# EAGLE board EEG (EAGLE 9.6.2)
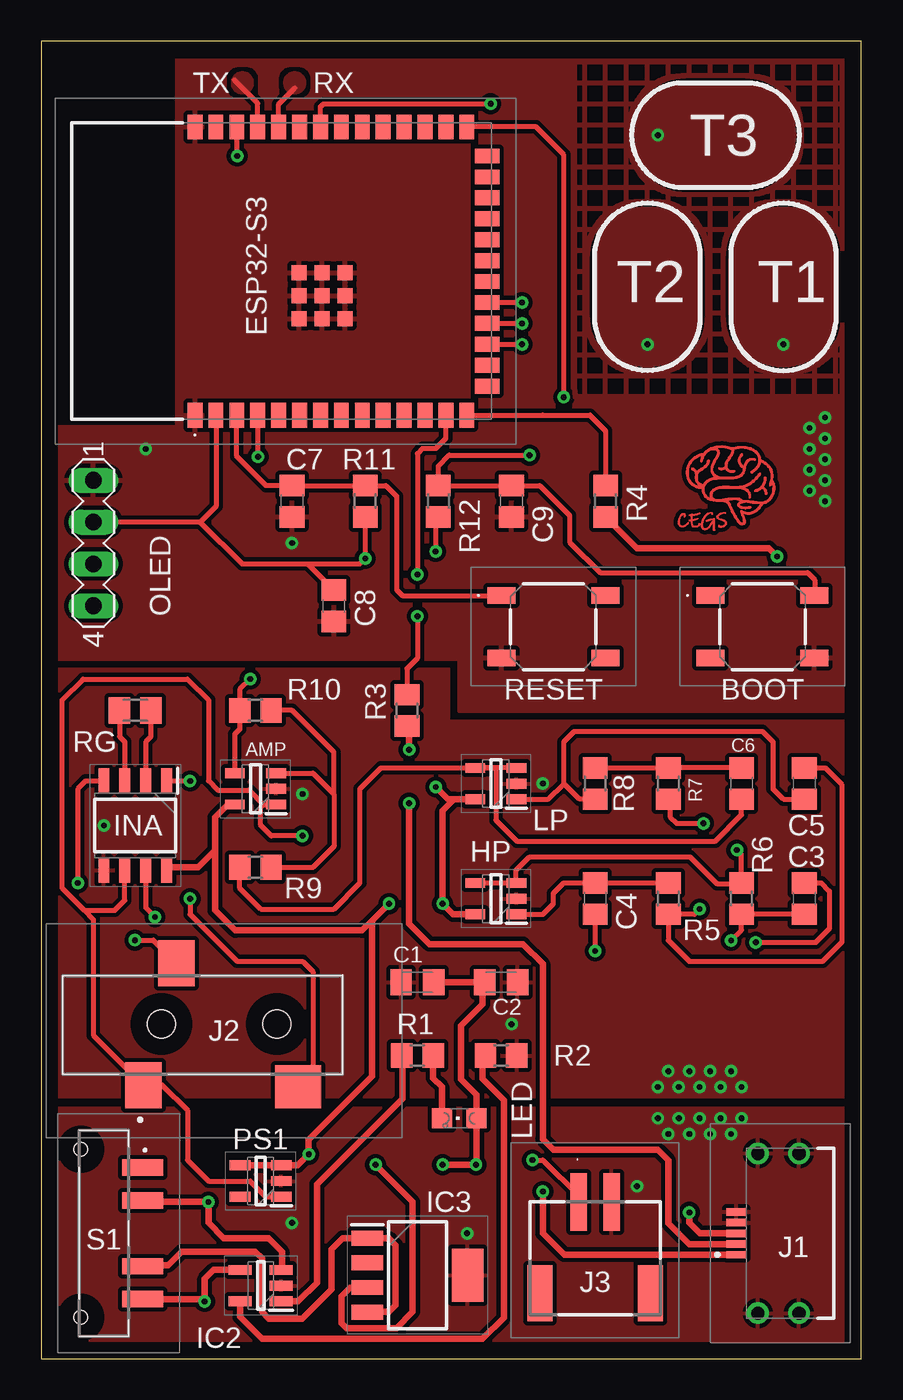
[diagram p0: board, top side]
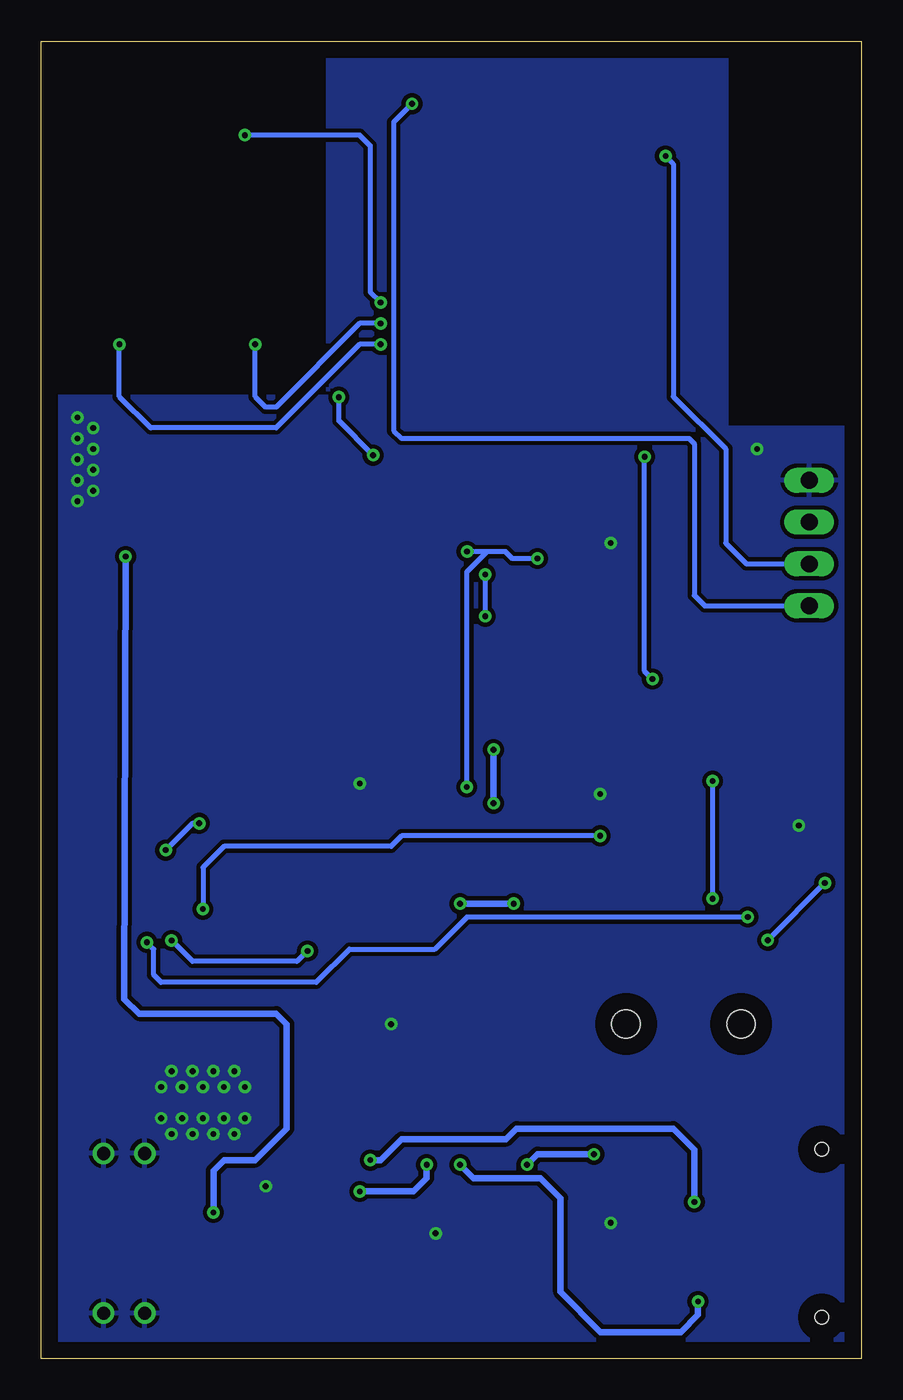
[diagram p1: board, bottom side, seen from below]

Size 49.84 x 80 mm. Coordinates in mm from the lower left corner, seen from the top.
Outline: 0,0 49.84,0 49.84,80 0,80 0,0
Copper layers (1*16): Top 0.035mm / dielectric 1.5mm / Bottom 0.035mm
Design rules "default": minimum track width 6mil, minimum drill 0.35mm, track to track 6mil, track to pad 6mil, pad to pad 6mil, via to via 6mil, smd to smd 6mil, copper to edge 40mil, drill to drill 6mil, minimum pad ring 10mil, minimum via ring 8mil, stop-mask expansion 4mil, vias tented up to drill 0mil, thermal gap 10mil

## Footprints (pad centres in the part's own frame; a part is rotated, then mirrored left to right if it is on the bottom)
SOT95P280X145-5N = smd 1.2 x 0.6: 1 -1.25,0.95; 2 -1.25,0; 3 -1.25,-0.95; 4 1.25,-0.95; 5 1.25,0.95
TS18517SL160SMTTR = smd 1.7 x 1: 1 -3.15,1.9; 2 3.15,1.9; 3 -3.15,-1.9; 4 3.15,-1.9
C0805K = smd 1.3 x 1.6: 1 -1,0; 2 1,0
C0805 = smd 1.3 x 1.5: 1 -0.95,0; 2 0.95,0
ESP32S3WROOM1N16R8 = smd 1.5 x 0.9: 1 -8.75,5.26; 2 -8.75,3.99; 3 -8.75,2.72; 4 -8.75,1.45; 5 -8.75,0.18; 6 -8.75,-1.09; 7 -8.75,-2.36; 8 -8.75,-3.63; 9 -8.75,-4.9; 10 -8.75,-6.17; 11 -8.75,-7.44; 12 -8.75,-8.71; 13 -8.75,-9.98; 14 -8.75,-11.25; 27 8.75,-11.25; 28 8.75,-9.98; 29 8.75,-8.71; 30 8.75,-7.44; 31 8.75,-6.17; 32 8.75,-4.9; 33 8.75,-3.63; 34 8.75,-2.36; 35 8.75,-1.09; 36 8.75,0.18; 37 8.75,1.45; 38 8.75,2.72; 39 8.75,3.99; 40 8.75,5.26 | smd 0.9 x 1.5: 15 -6.985,-12.5; 16 -5.715,-12.5; 17 -4.445,-12.5; 18 -3.175,-12.5; 19 -1.905,-12.5; 20 -0.635,-12.5; 21 0.635,-12.5; 22 1.905,-12.5; 23 3.175,-12.5; 24 4.445,-12.5; 25 5.715,-12.5; 26 6.985,-12.5 | smd 0.9 x 0.9: 41 -1.5,-2.46; 42 -2.9,-1.06; 43 -2.9,-2.46; 44 -2.9,-3.86; 45 -1.5,-3.86; 46 -0.1,-3.86; 47 -0.1,-2.46; 48 -0.1,-1.06; 49 -1.5,-1.06
SOT95P270X145-5N = smd 1.4 x 0.6: 1 -1.25,0.95; 2 -1.25,0; 3 -1.25,-0.95; 4 1.25,-0.95; 5 1.25,0.95
SOT150P700X180-5N = smd 1.9 x 0.9: 1 -3.05,2.25; 2 -3.05,0.75; 3 -3.05,-0.75; 4 -3.05,-2.25 | smd 1.9 x 3.2: 5 3.05,0
SOIC127P600X175-8N = smd 1.525 x 0.65: 1 -2.712,1.905; 2 -2.712,0.635; 3 -2.712,-0.635; 4 -2.712,-1.905; 5 2.712,-1.905; 6 2.712,-0.635; 7 2.712,0.635; 8 2.712,1.905
USB350030AKIT = smd 0.45 x 1.2: 1 -1.3,3.8; 2 -0.65,3.8; 3 0,3.8; 4 0.65,3.8; 5 1.3,3.8 | drill 0.8 pad 1.2: MH1 -4.85,2.5; MH2 4.85,2.5; MH3 -4.85,0; MH4 4.85,0
SJ3523SMTTR = smd 2.2 x 2.8: 1 2.4,-3.7; 3 4.4,3.7 | smd 2.8 x 2.6: 2 11.8,-3.8 | hole 1.7: 3.5,0; 10.5,0
1769 = smd 1 x 3.5: 1 -1,0; 2 1,0 | smd 1.5 x 3.4: 3 -3.35,-5.55; 4 3.35,-5.55
CHIPLED_0805 = smd 1.2 x 1.2: A 0,-1.05; C 0,1.05
MA04-1 = drill 1.016 long: 1 -3.81,0; 2 -1.27,0; 3 1.27,0; 4 3.81,0
SOT95P280X110-5N = smd 1.25 x 0.6: 1 -1.25,0.95; 2 -1.25,0; 3 -1.25,-0.95; 4 1.25,-0.95; 5 1.25,0.95
R0805 = smd 1.3 x 1.5: 1 -0.95,0; 2 0.95,0
M0805 = smd 1.3 x 1.6: 1 -0.95,0; 2 0.95,0
SS4CMVTR = smd 1 x 2.5: A1 -4,2.35; B1 -2,2.35; C1 2,2.35; D1 4,2.35 | hole 0.8: -5.1,-1.4; 5.1,-1.4

## Placement (x,y rotation side)
AMP  LMV321AUIDBVR  [SOT95P280X145-5N]  13.02,34.61 180 top
BOOT  TS18-5-17-SL-160-SMT-TR  [TS18517SL160SMTTR]  43.81,44.45 0 top
C1  10u  [C0805K]  22.86,22.86 180 top
C2  10u  [C0805K]  27.94,22.86 0 top
C3  100nF  [C0805]  46.35,27.94 270 top
C4  100nF  [C0805]  33.66,27.94 90 top
C5  100nF  [C0805]  46.35,34.92 90 top
C6  100nF  [C0805]  42.55,34.92 270 top
C7  0.1uF  [C0805]  15.24,52.07 90 top
C8  0.1uF  [C0805]  17.78,45.72 270 top
C9  0.1 uF  [C0805]  28.57,52.07 90 top
ESP32-S3  ESP32-S3-WROOM-1-N16R8  [ESP32S3WROOM1N16R8]  14.61,66.04 90 top
HP  LMV321AUIDBVR  [SOT95P280X145-5N]  27.62,27.94 180 top
IC2  MCP73831T-2ACI_OT  [SOT95P270X145-5N]  13.34,4.45 180 top
IC3  LP38692MP-3.3_NOPB  [SOT150P700X180-5N]  22.86,5.08 0 top
INA  AD8226ARZ-R7  [SOIC127P600X175-8N]  5.71,32.38 270 top
J1  USB3500-30-A-KIT  [USB350030AKIT]  46.04,7.62 90 top
J2  SJ-3523-SMT-TR  [SJ3523SMTTR]  3.81,20.32 0 top
J3  1769  [1769]  33.66,9.53 0 top
LED  [CHIPLED_0805]  25.4,14.61 90 top
LP  LMV321AUIDBVR  [SOT95P280X145-5N]  27.62,34.92 180 top
OLED  [MA04-1]  3.17,49.53 270 top
PS1  REF2033AIDDCR  [SOT95P280X110-5N]  13.34,10.79 180 top
R1  220  [R0805]  22.86,18.41 0 top
R2  2k  [R0805]  27.94,18.41 180 top
R3  22  [R0805]  22.23,39.37 90 top
R4  22  [R0805]  34.29,52.07 90 top
R5  230k  [R0805]  38.1,27.94 90 top
R6  230k  [R0805]  42.55,27.94 270 top
R7  33k  [R0805]  38.1,34.92 90 top
R8  33k  [R0805]  33.66,34.92 270 top
R9  1k  [R0805]  13.02,29.84 0 top
R10  51k  [R0805]  13.02,39.37 180 top
R11  10k  [R0805]  19.68,52.07 270 top
R12  10k  [R0805]  24.13,52.07 270 top
RESET  TS18-5-17-SL-160-SMT-TR  [TS18517SL160SMTTR]  31.11,44.45 0 top
RG  50  [M0805]  5.71,39.37 0 top
S1  SS4-CM-V-T_R  [SS4CMVTR]  3.81,7.62 270 top

## Library data of the parts
AMP HP LP = LMV321AUIDBVR; DESCRIPTION: Operational Amplifiers - Op Amps Single Low-Voltage, Cost-Optimized Rail-to-Rail Output Operational Amplifier 5-SOT-23 -40 to 125; HEIGHT: 1.45mm; MANUFACTURER_NAME: Texas Instruments; MANUFACTURER_PART_NUMBER: LMV321AUIDBVR; MOUSER_PART_NUMBER: 595-LMV321AUIDBVR; MOUSER_PRICE-STOCK: https://www.mouser.co.uk/ProductDetail/Texas-Instruments/LMV321AUIDBVR?qs=GBLSl2AkirulEcoP6K7rtg%3D%3D
BOOT RESET = TS18-5-17-SL-160-SMT-TR; DESCRIPTION: 5 x 5 mm, 1.7 mm Actuator Height, 160 gf, Silver, Surface Mount, TR, SPST, Tactile Switch; HEIGHT: 1.8mm; MANUFACTURER_NAME: Same Sky; MANUFACTURER_PART_NUMBER: TS18-5-17-SL-160-SMT-TR; MOUSER_PART_NUMBER: 179-TS18517SL160SMTT; MOUSER_PRICE-STOCK: https://www.mouser.co.uk/ProductDetail/CUI-Devices/TS18-5-17-SL-160-SMT-TR?qs=tlsG%2FOw5FFhWy38y3t272A%3D%3D
C1-C9 = rcl; SPICEPREFIX: C
ESP32-S3 = ESP32-S3-WROOM-1-N16R8; DESCRIPTION: Multiprotocol Modules SMD Module, ESP32-S3R8, 3.3V, 8 MB Octal PSRAM Die, 16 MB Quad SPI Flash, PCB Antenna; HEIGHT: 3.25mm; MANUFACTURER_NAME: Espressif Systems; MANUFACTURER_PART_NUMBER: ESP32-S3-WROOM-1-N16R8; MOUSER_PART_NUMBER: 356-ESP32S3WRM1N16R8; MOUSER_PRICE-STOCK: https://www.mouser.co.uk/ProductDetail/Espressif-Systems/ESP32-S3-WROOM-1-N16R8?qs=Li%252BoUPsLEnvQc9gW6AMhZg%3D%3D
IC2 = MCP73831T-2ACI_OT; DESCRIPTION: Li-Ion Charge Controller 4.2V SOT23-5; HEIGHT: 1.45mm; MANUFACTURER_NAME: Microchip; MANUFACTURER_PART_NUMBER: MCP73831T-2ACI/OT; MOUSER_PART_NUMBER: 579-MCP73831T-2ACIOT; MOUSER_PRICE-STOCK: https://www.mouser.co.uk/ProductDetail/Microchip-Technology/MCP73831T-2ACI-OT?qs=yUQqVecv4qvbBQBGbHx0Mw%3D%3D
IC3 = LP38692MP-3.3_NOPB; DESCRIPTION: LP38692MP-3.3/NOPB, Low Dropout Voltage Regulator, 1A, 3.3 V +/-2.5%, 2.7 10 Vin, 5-Pin SOT-223; HEIGHT: 1.8mm; MANUFACTURER_NAME: Texas Instruments; MANUFACTURER_PART_NUMBER: LP38692MP-3.3/NOPB; MOUSER_PART_NUMBER: 926-LP38692MP3.3NOPB; MOUSER_PRICE-STOCK: https://www.mouser.co.uk/ProductDetail/Texas-Instruments/LP38692MP-3.3-NOPB?qs=1FNqv8aZn1TpKuOP2NKBdg%3D%3D
INA = AD8226ARZ-R7; DESCRIPTION: Wide Supply Range, Rail-to-Rail Output Instrumentation Amplifier; HEIGHT: 1.75mm; MANUFACTURER_NAME: Analog Devices; MANUFACTURER_PART_NUMBER: AD8226ARZ-R7; MOUSER_PART_NUMBER: 584-AD8226ARZ-R7; MOUSER_PRICE-STOCK: https://www.mouser.co.uk/ProductDetail/Analog-Devices/AD8226ARZ-R7?qs=%2FtpEQrCGXCxwcvDsZqDBEQ%3D%3D
J1 = USB3500-30-A-KIT; DESCRIPTION: USB Connectors Micro B Skt, Mid Mount-SMT, R/A, 30u", With Peg, T&R, IP67 + USBTJ-02 Gasket; HEIGHT: 2.8mm; MANUFACTURER_NAME: GCT (GLOBAL CONNECTOR TECHNOLOGY); MANUFACTURER_PART_NUMBER: USB3500-30-A-KIT; MOUSER_PART_NUMBER: 640-USB3500-30-A-KIT; MOUSER_PRICE-STOCK: https://www.mouser.co.uk/ProductDetail/GCT/USB3500-30-A-KIT?qs=KUoIvG%2F9IlZmD2kH2DfgYg%3D%3D
J2 = SJ-3523-SMT-TR; DESCRIPTION: 3.5 mm, Stereo, Right Angle, Surface Mount (SMT), 3 Conductors, 0 Internal Switches, Audio Jack Connector; HEIGHT: 5.2mm; MANUFACTURER_NAME: Same Sky; MANUFACTURER_PART_NUMBER: SJ-3523-SMT-TR; MOUSER_PART_NUMBER: 490-SJ-3523-SMT-TR; MOUSER_PRICE-STOCK: https://www.mouser.co.uk/ProductDetail/CUI-Devices/SJ-3523-SMT-TR?qs=WyjlAZoYn51zOHzJ3r4ZRA%3D%3D
J3 = 1769 (1); ARROW_PART_NUMBER: 1769; ARROW_PRICE-STOCK: https://www.arrow.com/en/products/1769/adafruit-industries?utm_currency=USD&region=nac; DESCRIPTION: Adafruit Accessories JST-PH 2-pin SMT Right Angle Connect; HEIGHT: 5.5mm; MANUFACTURER_NAME: Adafruit; MANUFACTURER_PART_NUMBER: 1769; MOUSER_PART_NUMBER: 485-1769; MOUSER_PRICE-STOCK: https://www.mouser.co.uk/ProductDetail/Adafruit/1769?qs=GURawfaeGuBbgoGtf2XstA%3D%3D
LED = led
OLED = con-lstb; OC_FARNELL: unknown; OC_NEWARK: unknown
PS1 = REF2033AIDDCR; DESCRIPTION: Low-Drift, Low-Power, Dual-Output Vref and Vref/2 Voltage Reference; HEIGHT: 1.1mm; MANUFACTURER_NAME: Texas Instruments; MANUFACTURER_PART_NUMBER: REF2033AIDDCR; MOUSER_PART_NUMBER: 595-REF2033AIDDCR; MOUSER_PRICE-STOCK: https://www.mouser.co.uk/ProductDetail/Texas-Instruments/REF2033AIDDCR?qs=7z%252BmIopC6%2FKHHOBVNaL7UQ%3D%3D
R1-R12 RG = rcl; SPICEPREFIX: R
S1 = SS4-CM-V-T_R; DESCRIPTION: Slide Switches Slide Type 1P3T (2.0mm height); HEIGHT: 2mm; MANUFACTURER_NAME: Diptronics; MANUFACTURER_PART_NUMBER: SS4-CM-V-T/R; MOUSER_PART_NUMBER: 113-SS4CMVTR; MOUSER_PRICE-STOCK: https://www.mouser.co.uk/ProductDetail/Diptronics/SS4-CM-V-T-R?qs=MLItCLRbWswqNEU%2F6grMKg%3D%3D

## Nets
+3V3: AMP.5 C8.1 ESP32-S3.2 HP.5 IC3.3 INA.8 LP.5 OLED.2 PS1.3 PS1.4 R11.2 R12.2
+5V: C1.1 C2.1 IC2.4 J1.1 LED.A S1.D1
+BATT: IC2.3 J3.1 S1.B1
CS1: INA.1 J2.2
CS2: INA.4 J2.3
GND: AMP.2 BOOT.4 C1.2 C2.2 C7.1 C8.2 C9.1 ESP32-S3.1 ESP32-S3.40 ESP32-S3.41 ESP32-S3.42 ESP32-S3.43 ESP32-S3.44 ESP32-S3.45 ESP32-S3.46 ESP32-S3.47 ESP32-S3.48 ESP32-S3.49 HP.2 IC2.2 IC3.5 INA.5 J1.4 J1.5 J1.MH1 J1.MH2 J1.MH3 J1.MH4 J3.2 LP.2 OLED.1 PS1.2 R2.1 RESET.3
N$2: IC2.5 R2.2
N$3: LED.C R1.2
N$4: C6.1 R7.2 R8.1
N$5: C4.2 HP.1 R5.2
N$6: C3.2 C4.1 R6.2
N$7: C5.1 LP.1 R8.2
N$8: AMP.3 R9.2 R10.1
N$9: INA.2 RG.2
N$10: IC2.1 R1.1
N$11: IC3.1 IC3.4 S1.C1
N$12: INA.3 RG.1
N$13: BOOT.2 C9.2 ESP32-S3.27 R12.1
N$14: ESP32-S3.14 R4.2
N$18: ESP32-S3.13 R3.2
N$19: C7.2 ESP32-S3.3 R11.1 RESET.1
O1: C3.1 INA.7
O2: HP.3 HP.4 R6.1 R7.1
O3: C6.2 LP.3 LP.4 R9.1
O4: AMP.4 ESP32-S3.4 R10.2
RX: ESP32-S3.36
SCL: ESP32-S3.38 OLED.3
SDA: ESP32-S3.34 OLED.4
TOUCHP_1: ESP32-S3.17
TOUCHP_2: ESP32-S3.18
TOUCHP_3: ESP32-S3.19
TX: ESP32-S3.37
USB_2: J1.2 R3.1
USB_3: J1.3 R4.1
VSS: AMP.1 C5.2 INA.6 J2.1 PS1.1 R5.1

## Tracks (layer width: path | path; a pad name or v marks a point on that pad's centre or on a via)
+3V3  (via drill 0.35)
  Top 0.305: 11.43,33.66 AMP.5 | R12.2 23.98,50.97 23.98,49.03 v23.96,49.02 | R11.2 v19.68,48.59 19.36,48.26 16.19,48.26 | 10.57,27.23 10.57,27.3 | ESP32-S3.2 10.62,51.75 9.66,50.8 | 9.66,50.8 OLED.2 | 9.66,50.8 12.2,48.26 16.19,48.26 | 16.19,48.26 C8.1
  Top 0.406: v20.32,11.79 22.57,9.53 22.57,2.86 21.58,1.87 18.55,1.87 18.26,2.16 18.26,3.81 18.78,4.33 IC3.3 | 20.09,26.59 20.09,17.14 16.26,13.31 v16.26,12.42 15.58,11.74 PS1.3 PS1.4 | 20.09,26.59 v21.13,27.64 | 20.09,26.59 19.51,26.01 11.79,26.01 10.57,27.23 | 10.57,27.3 10.57,30.89 | 10.57,30.89 10.57,32.87 11.36,33.66 11.43,33.66 | INA.8 7.79,29.84 9.53,29.84 10.57,30.89 | 25.09,33.98 LP.5 | 25.09,33.98 24.38,33.27 v24.38,27.64 25.03,26.99 HP.5 | v23.98,34.72 24.72,33.98 25.09,33.98
  Bottom 0.305: v23.98,34.72 23.98,47.78 22.74,49.02 | v19.68,48.59 21.2,48.59 21.62,49.02 22.74,49.02 | 22.74,49.02 v23.96,49.02
  Bottom 0.406: v16.26,12.42 19.68,12.42 v20.32,11.79 | v21.13,27.64 v24.38,27.64
+5V  (via drill 0.35)
  Top 0.152: 11.74,5.39 IC2.4
  Top 0.406: C1.1 C2.1 26.82,22.74 26.82,21.54 25.51,20.23 25.51,16.98 26.45,16.04 LED.A 26.45,11.82 v26.42,11.79 v24.38,11.79 | v30.48,10.16 30.48,7.62 31.78,6.32 J1.1 | S1.D1 9.79,3.62 v9.93,3.48 9.93,4.85 10.47,5.39 11.74,5.39
  Bottom 0.406: v9.93,3.48 9.93,2.67 10.97,1.63 15.85,1.63 18.29,4.06 18.29,9.75 19.51,10.97 23.57,10.97 v24.38,11.79 | v26.42,11.79 26.42,10.97 27.23,10.16 v30.48,10.16
+BATT  (via drill 0.35)
  Top 0.305: v29.84,12.06 30.48,12.06 32.66,9.89 J3.1
  Top 0.406: IC2.3 14.63,5.44 14.63,6.5 13.82,7.32 11.1,7.32 10.16,8.26 v10.16,9.53 6.25,9.53 S1.B1
  Bottom 0.406: v29.84,12.06 29.21,12.06 27.94,13.34 21.59,13.34 20.95,13.97 11.43,13.97 10.16,12.7 v10.16,9.53
CS1  (via drill 0.35)
  Top 0.305: INA.1 9.04,35.1 v9.05,35.08 | v9.05,27.94 9.05,26.99 11.91,24.13 15.88,24.13 16.51,23.5 16.51,17.78 15.61,16.88 J2.2
  Bottom 0.305: v9.05,35.08 v9.05,27.94
CS2  (via drill 0.35)
  Top 0.305: v2.22,28.89 2.22,34.61 2.71,35.1 INA.4 | v5.7,25.42 6.81,25.42 J2.3
  Bottom 0.305: v2.22,28.89 v5.7,25.42
GND  (via drill 0.35)
  other vias: 37.47,14.61 38.73,14.61 40.01,14.61 41.27,14.61 42.55,14.61 41.91,13.65 40.64,13.65 39.37,13.65 38.1,13.65 37.47,16.51 38.73,16.51 40.01,16.51 41.27,16.51 42.55,16.51 41.91,17.46 40.64,17.46 39.37,17.46 36.2,10.48 25.88,7.62 15.24,8.26 38.1,17.46 47.62,57.15 47.62,55.88 47.62,54.61 47.62,53.34 47.62,52.07 46.67,56.52 46.67,55.24 46.67,53.98 46.67,52.7 6.35,55.24 15.24,49.53 28.57,20.32 30.48,34.92 15.88,34.29 3.81,32.38
  pour Top (isolate 0.254, rank 2): 0,0 0,15.24 49.53,15.24 49.53,0
  pour Top (isolate 0.254, rank 2): 0,15.88 49.53,15.88 49.53,38.73 24.77,38.73 24.77,41.91 0,41.91
  pour Top (isolate 0.254, rank 2): 0,42.55 25.4,42.55 25.4,39.37 49.53,39.37 49.53,58.42 32.38,58.42 32.38,79.38 8.26,79.38 8.26,56.52 0,56.52
  pour Bottom (isolate 0.254): 0,0 49.53,0 49.53,58.42 32.38,58.42 32.38,80.01 8.26,80.01 8.26,56.52 0,56.52
  pour Top (rank 2, hatched): 32.38,79.38 32.38,58.42 49.53,58.42 49.53,79.38
N$2
  Top 0.406: IC2.5 12.09,2.54 13.41,1.22 26.82,1.22 28.11,2.51 28.11,15.71 26.82,17 26.82,18.25 R2.2
N$3
  Top 0.406: R1.2 23.81,17.05 24.35,16.51 LED.C
N$4
  Top 0.305: C6.1 R7.2 R8.1
N$5
  Top 0.305: R5.2 C4.2 31.75,28.89 31.11,28.26 31.11,27.62 30.48,26.99 HP.1
N$6  (via drill 0.35)
  Top 0.305: C3.2 R6.2 42.55,26.04 v41.91,25.4 | C4.1 v33.66,24.77
  Bottom 0.305: v33.66,24.77 34.29,24.13 40.64,24.13 v41.91,25.4
N$7
  Top 0.305: C5.1 45.09,33.98 44.45,34.61 44.45,37.47 43.81,38.1 32.38,38.1 31.75,37.47 31.75,34.92 | LP.1 30.8,33.98 31.75,34.92 | R8.2 32.7,33.98 31.75,34.92
N$8
  Top 0.305: R9.2 16.51,29.84 17.78,31.12 17.78,34.29 | AMP.3 16.51,35.56 17.78,34.29 | 17.78,34.29 17.78,36.83 15.24,39.37 R10.1
N$9
  Top 0.305: RG.2 6.67,37.78 6.35,37.47 INA.2
N$10
  Top 0.406: IC2.1 15.62,3.5 16.75,4.63 16.75,10.6 21.95,15.8 21.95,18.38 R1.1
N$11
  Top 0.305: S1.C1 6.23,5.69 6.91,5.69 | IC3.4 19.82,2.85 20.32,2.85
  Top 0.406: 20.32,2.85 21.13,2.85 21.54,3.25 21.54,6.91 21.13,7.32 19.82,7.32 IC3.1 18.3,7.33 17.63,6.66 17.63,4.22 15.85,2.44 13.82,2.44 13.41,2.85 13.41,6.1 13.01,6.5 8.53,6.5 7.72,5.69 6.91,5.69
N$12
  Top 0.305: RG.1 4.76,37.78 5.08,37.47 INA.3
N$13  (via drill 0.35)
  Top 0.152: BOOT.2 46.99,46.38
  Top 0.305: 46.99,46.38 46.99,47.3 46.56,47.73 33.96,47.73 32.11,49.58 32.11,51.21 30.29,53.02 C9.2 R12.1 24.13,54.2 24.79,54.86 v29.67,54.86 | v31.75,58.39 31.75,73.1 30.06,74.79 ESP32-S3.27
  Bottom 0.305: v29.67,54.86 31.75,56.95 v31.75,58.39
N$14
  Top 0.305: ESP32-S3.14 30.48,57.29 33.34,57.29 34.29,56.34 R4.2
N$18  (via drill 0.35)
  Top 0.305: ESP32-S3.13 24.59,55.88 23.98,55.27 23.16,55.27 22.86,54.97 v22.86,47.62 | v22.86,45.09 22.86,42.55 22.23,41.91 R3.2
  Bottom 0.305: v22.86,47.62 v22.86,45.09
N$19
  Top 0.305: RESET.1 27.95,46.33 21.95,46.33 21.59,46.69 21.59,52.38 20.95,53.02 R11.1 C7.2 13.65,53.02 11.88,54.79 ESP32-S3.3
O1  (via drill 0.35)
  Top 0.305: INA.7 6.35,27.38 v6.91,26.82 | C3.1 47.4,28.89 47.89,28.4 47.89,26.11 47.06,25.29 v43.41,25.29
  Bottom 0.305: v43.41,25.29 43,24.88 43,23.32 42.55,22.86 33.13,22.86 31.11,24.88 25.92,24.88 23.98,26.82 v6.91,26.82
O2  (via drill 0.35)
  Top 0.305: HP.4 HP.3 28.85,28.91 28.85,29.67 29.67,30.48 39.42,30.48 41.05,28.85 42.51,28.85 | 42.51,28.85 R6.1 | v42.27,30.89 42.51,30.64 42.51,28.85 | R7.1 38.2,33.87 38.2,32.92 38.61,32.51 v40.23,32.51
  Bottom 0.305: v40.23,32.51 40.64,32.51 v42.27,30.89
O3
  Top 0.305: LP.4 20.64,35.88 19.37,34.61 19.37,28.89 17.78,27.3 13.34,27.3 12.07,28.57 R9.1 | LP.4 27.62,35.88 27.62,32.7 28.89,31.43 40.96,31.43 42.55,33.02 C6.2 | LP.3 LP.4
O4  (via drill 0.35)
  Top 0.305: AMP.4 11.77,37.92 12.07,38.22 R10.2 12.06,40.64 v12.7,41.27 | v13.18,54.77 13.18,57.27 ESP32-S3.4
  Bottom 0.305: v12.7,41.27 13.18,41.75 v13.18,54.77
RX
  Top 0.305: ESP32-S3.36 14.43,76.18 15.4,77.15
  pour Top (isolate 0.254): 14.76,77.47 arc-90 15.4,78.11 arc-90 16.03,77.47 arc-90 15.4,76.83 arc-90
SCL  (via drill 0.35)
  Top 0.305: v11.91,73.03 11.91,74.77 ESP32-S3.38
  Bottom 0.305: v11.91,73.03 11.43,72.55 11.43,58.42 8.26,55.24 8.26,49.53 6.99,48.26 OLED.3
SDA  (via drill 0.35)
  Top 0.305: ESP32-S3.34 16.96,76.02 17.14,76.2 v27.3,76.2
  Bottom 0.305: v27.3,76.2 28.42,75.09 28.42,56.36 27.94,55.88 10.48,55.88 10.16,55.56 10.16,46.35 9.53,45.72 OLED.4
TOUCHP_1  (via drill 0.35)
  Top 0.305: ESP32-S3.17 v29.21,61.59
  Bottom 0.305: v29.21,61.59 30.48,61.59 35.56,56.52 43.18,56.52 45.09,58.42 v45.09,61.59
  pour Top (isolate 0.254): 45.09,69.85 arc-90 48.26,66.67 48.26,63.5 arc-90 45.09,60.33 arc-90 41.91,63.5 41.91,66.67 arc-90
TOUCHP_2  (via drill 0.35)
  Top 0.305: ESP32-S3.18 v29.21,62.87
  Bottom 0.305: v29.21,62.87 30.48,62.87 35.56,57.78 36.2,57.78 36.83,58.42 v36.83,61.59
  pour Top (isolate 0.254): 36.83,69.85 arc-90 40.01,66.67 40.01,63.5 arc-90 36.83,60.33 arc-90 33.66,63.5 33.66,66.67 arc-90
TOUCHP_3  (via drill 0.35)
  Top 0.305: ESP32-S3.19 v29.21,64.14
  Bottom 0.305: v29.21,64.14 29.84,64.77 29.84,73.66 30.48,74.3 v37.47,74.3
  pour Top (isolate 0.254): 36.2,74.3 arc-90 39.37,77.47 42.55,77.47 arc-90 45.72,74.3 arc-90 42.55,71.12 39.37,71.12 arc-90
TX
  Top 0.305: ESP32-S3.37 13.15,76.22 11.75,77.63
  pour Top (isolate 0.254): 12.22,76.83 arc-90 11.59,77.47 arc-90 12.22,78.11 arc-90 12.86,77.47 arc-90
USB_2  (via drill 0.35)
  Top 0.406: J1.2 39.37,6.97 38.1,8.24 38.1,12.06 37.47,12.7 31.11,12.7 30.48,13.34 30.48,23.98 29.28,25.18 23.59,25.18 22.35,26.42 v22.35,33.73 | R3.1 22.35,38.29 v22.35,36.98
  Bottom 0.406: v22.35,33.73 v22.35,36.98
USB_3  (via drill 0.35)
  Top 0.406: R4.1 36.2,49.22 44.21,49.22 v44.7,48.72 | v39.37,8.89 39.37,8.26 40.01,7.62 J1.3
  Bottom 0.406: v44.7,48.72 44.78,21.84 43.89,20.95 35.56,20.95 34.92,20.32 34.92,13.97 36.83,12.06 38.73,12.06 39.37,11.43 v39.37,8.89
VSS  (via drill 0.35)
  Top 0.305: C5.2 47.63,35.88 48.65,34.85 48.65,25.31 47.47,24.13 39.37,24.13 38.1,25.4 R5.1 39.69,26.99 v40.01,27.3 | 2.62,27.23 4.47,27.23 5.08,27.84 INA.6 | 2.62,27.23 1.27,28.57 1.27,40.01 2.54,41.27 8.89,41.27 10.16,40.01 10.16,35.08 10.72,34.53 12.62,34.53 13.49,33.66 | 13.49,33.66 AMP.1 | 13.49,33.66 13.34,33.5 13.34,32.38 13.97,31.75 v15.88,31.75 | 2.62,27.23 3.17,26.67 3.17,19.66 J2.1 7.36,16.62 8.89,15.09 8.89,12.06 10.16,10.79 12.7,10.79 13.65,9.85 PS1.1
  Bottom 0.305: v15.88,31.75 27.94,31.75 28.57,31.11 38.73,31.11 40.01,29.84 v40.01,27.3
(copper drawn outside any net)
  shapes: Top area x1082

## Text on the board
tNames: TX | RX | T3 | T2 | T1
200bmp: C:/Users/carve/Downloads/logo.bmp